# Altium PCB PCB1.PcbDoc
Units mm, origin at the board's own origin, x right, y up, seen from the top; angles counter-clockwise.
Board outline 67.59 x 51.31 mm, 2 copper layers (Top Layer, Bottom Layer), stack 1.534 mm thick; 29 components, 12 nets, 688 pads, 21 vias.
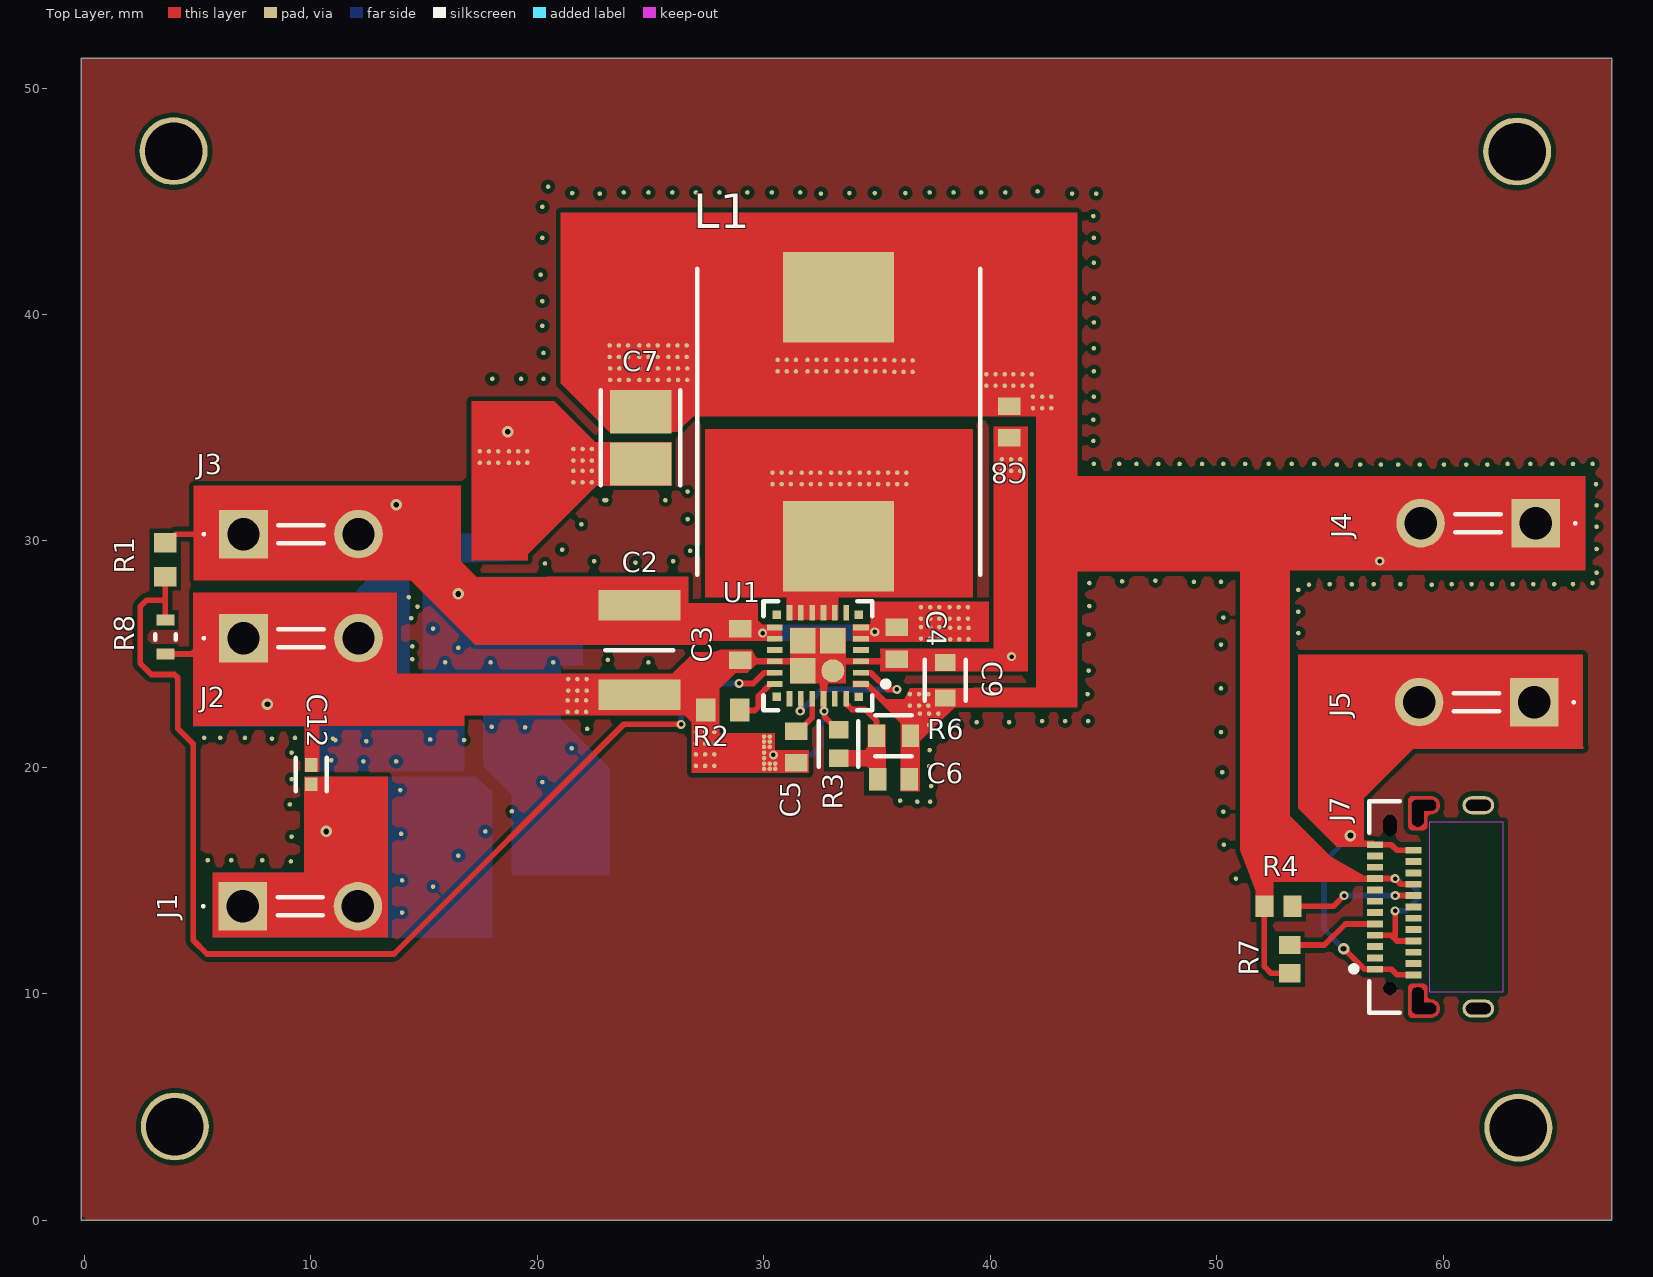
[diagram p0: Top Layer view]
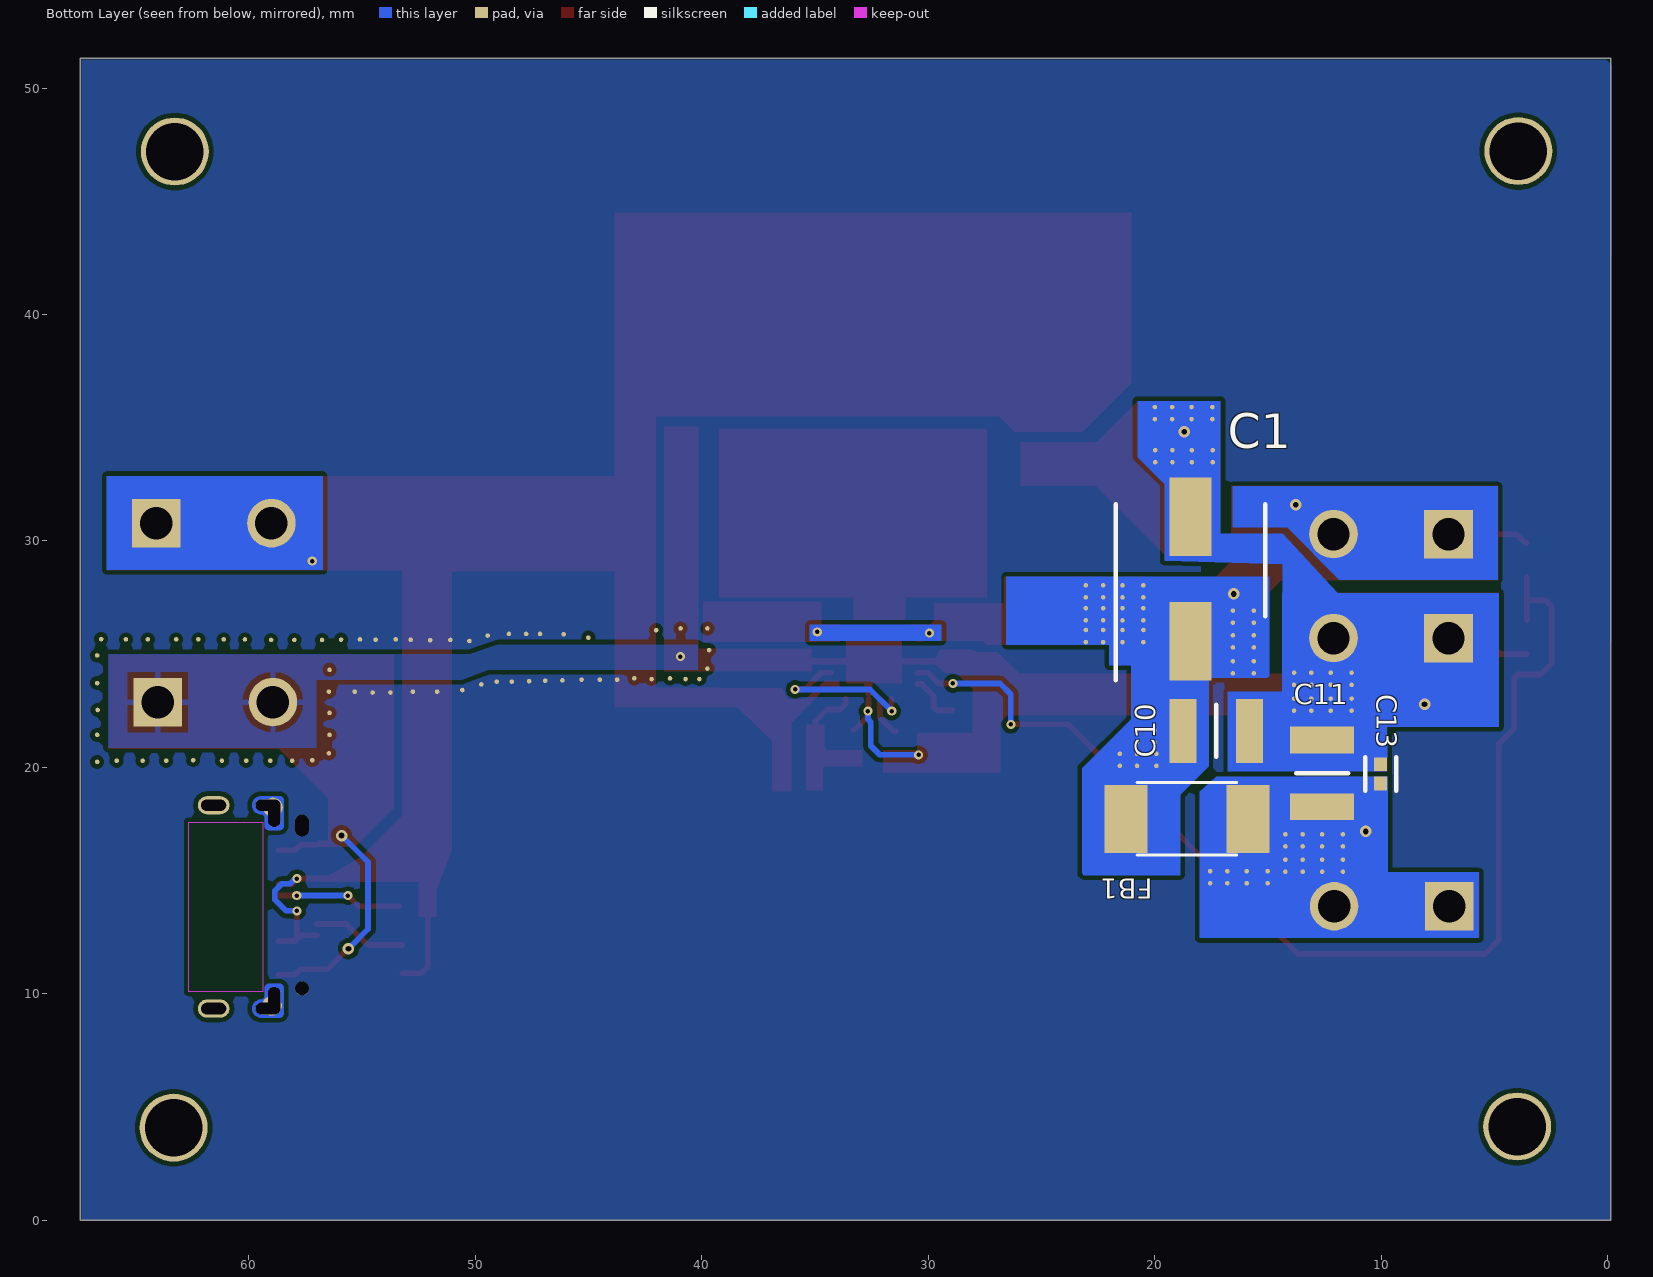
[diagram p1: Bottom Layer view, seen from below]
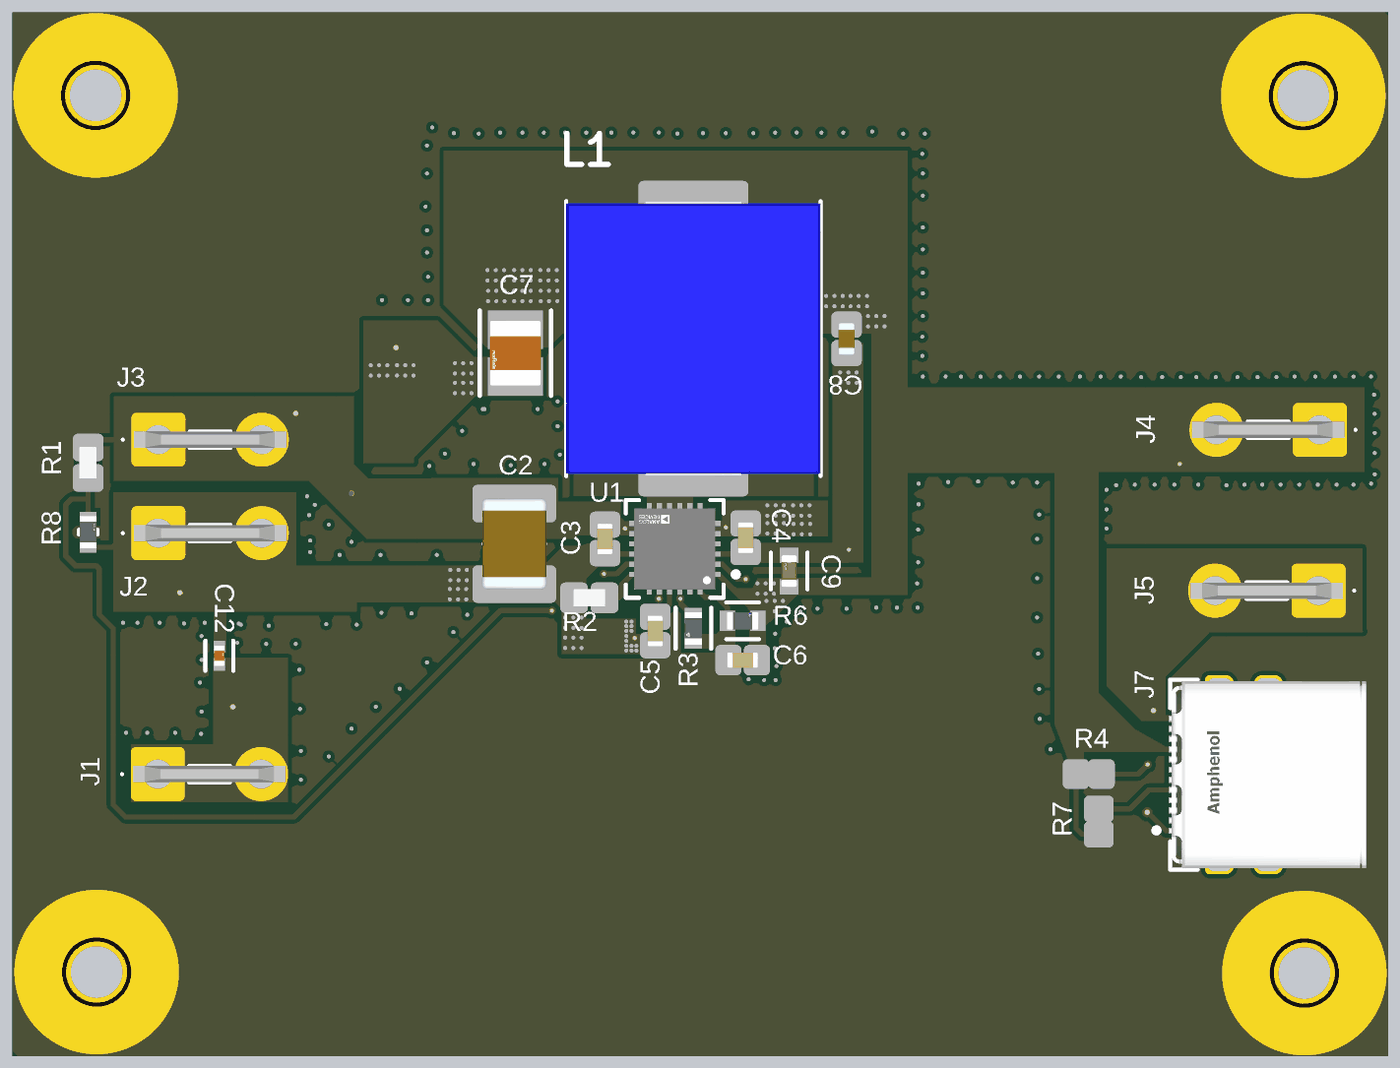
[diagram p2: 3D render of the assembled board from above, using the file's embedded part models]
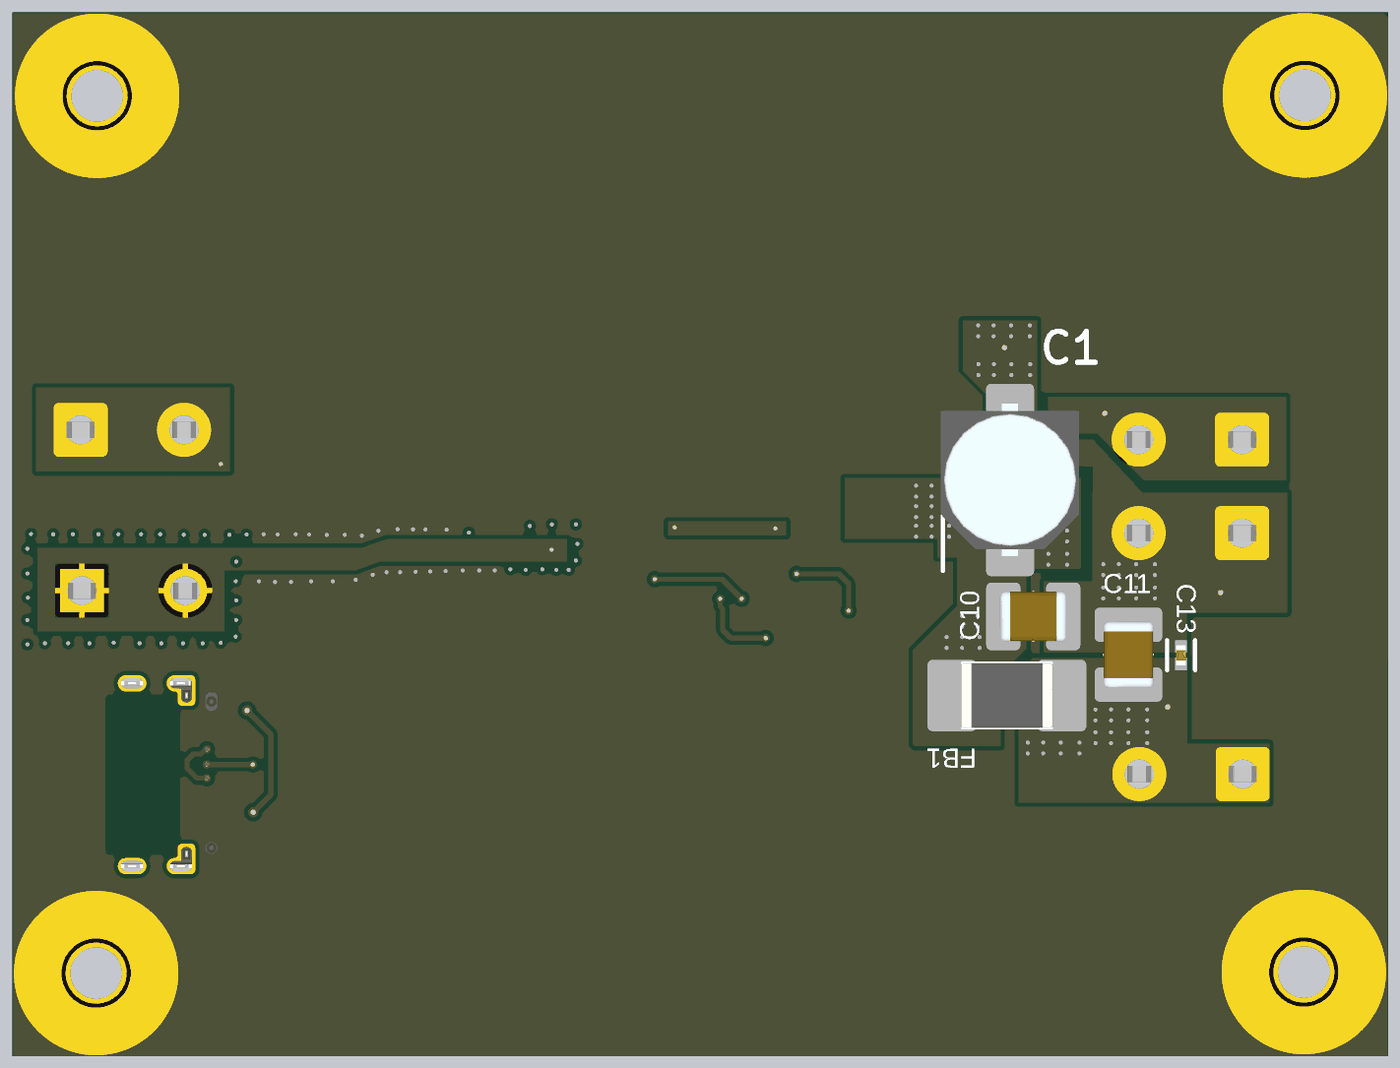
[diagram p3: 3D render of the assembled board from below, using the file's embedded part models]

## Layer stack, top to bottom
Top Solder: solder mask 0.0127, Solder Resist, Dk 3.3
Top Layer: signal copper 0.0178
Dielectric1: core 1.4986, FR-4, Dk 4.3
Bottom Layer: signal copper 0.0178
Bottom Solder: solder mask 0.0127, Solder Resist, Dk 3.3

## Board outline
-0.152,0 67.437,0 67.437,51.308 -0.152,51.308

## Design rules (kind name [scope] priority, off if disabled: settings)
Clearance [All] p1: gap=0.2 ignorepadtopadclearanceinfootprint=FALSE except(0: Arc-Hole Track-Hole SMDPad-Hole THPad-Hole Via-Hole Fill-Hole Poly-Hole Region-Hole Text-Hole)
DiffPairsRouting [All] p1: maxlimit=0.254 minlimit=0.254 mostfreqgap=0.254 toplayer_minwidth=0.254 toplayer_maxwidth=0.254 toplayer_prefwidth=0.254 bottomlayer_minwidth=0.254 bottomlayer_maxwidth=0.254 bottomlayer_prefwidth=0.254 maxuncoupledlength=12.7
HoleSize [All] p1: absolutevalues=TRUE maxlimit=7.62 minlimit=0.254 maxpercent=80.000 minpercent=20.000
MinimumAnnularRing [All] p1: minimumring=0.254
PasteMaskExpansion [All] p1: expansion=0.254
PlaneClearance [All] p1: clearance=0.381
PlaneConnect [All] p1: pad.planeconnectstyle=Relief pad.reliefexpansion=0.508 pad.reliefentries=4 pad.reliefconductorwidth=0.254 pad.reliefairgap=0.254 via.planeconnectstyle=Direct via.reliefexpansion=0.508 via.reliefentries=4 via.reliefconductorwidth=0.254 via.reliefairgap=0.254
PolygonConnect [All] p1: thpad.connectstyle=Relief thpad.reliefconductorwidth=0.254 thpad.reliefentries=4 thpad.polygonreliefangle="90 Angle" thpad.airgapwidth=0.254 smdpad.connectstyle=Relief smdpad.reliefconductorwidth=0.254 smdpad.reliefentries=4 smdpad.polygonreliefangle="90 Angle" smdpad.airgapwidth=0.254 via.connectstyle=Direct via.reliefconductorwidth=0.254 via.reliefentries=4 via.polygonreliefangle="90 Angle" via.airgapwidth=0.254
RoutingVias RoutingVias_small [All] p1: holewidth=0.2 width=0.4 viastyle="Through Hole" minholewidth=0.2 minwidth=0.4 maxholewidth=0.254 maxwidth=0.508
RoutingVias [All] p2: holewidth=0.254 width=0.508 viastyle="Through Hole" minholewidth=0.254 minwidth=0.508 maxholewidth=0.254 maxwidth=0.508
SMDNeckDown [InNet('NetC1_1')] p1: percent=100.000
SilkToSolderMaskClearance SilkscreenOverComponentPads [IsPad] p1: minsilkscreentomaskgap=0.254 clearancetoexposedcopper=TRUE
SolderMaskExpansion [All] p1: expansion=0.254 istentingtop=FALSE
SupplyNets "Schematic Supply Nets" [InNet('GND')] p1: voltage=0.000
Width [All] p1: maxlimit=0.254 minlimit=0.254 preferedwidth=0.254
24 further rules are at their usual default settings.

## Components (designator, comment, footprint, x,y, rotation, side; value= is the part's Value field where it differs from the comment)
C1 "875585845002" CAPAE660X800N 18.422,28.321 r90 bottom value=22µF
C2 "KGM43JR71H106KV" CAPC4532X280N 24.507,25.182 r90 top value=10uF
C3 "06035D105KAT2A" CAPC1608X90N 28.963,25.425 r90 top value=1µF
C4 "06035D105KAT2A" CAPC1608X90N 35.876,25.483 r90 top value=1µF
C5 "0603YC104K4T4A" CAPC1608X90N 31.431,20.899 r270 top value=0.1uF
C6 "06035U100JAT2A" CAPC1608X90N 35.725,19.469 r0 top value=10pF
C7 "GRM32ER61A107ME20L" FP-GRM32E-0_3-0_2-IPC_B 24.561,34.555 r270 top
C8 "KGM15BR71A105KT" CAPC1608X95N 40.832,35.255 r90 top value=1µF
C9 "GRM188R61E106MA73D" FP-GRM188-0_2-MFG 38.009,23.849 r90 top
C10 "KAM32LR71H106KL" CAPC3325X280N 17.279,21.615 r0 bottom value=10uF
C11 "KAM32LR71H106KL" CAPC3325X280N 12.605,19.736 r270 bottom value=10uF
C12 "GRM155R71H104KE14D" FP-GRM155-0_05-IPC_B 10.014,19.685 r90 top
C13 "GRM155R71H104KE14D" FP-GRM155-0_05-IPC_B 10.022,19.71 r90 bottom
FB1 "74279226101" WE-MPSB_181252 18.574,17.729 r0 bottom
J1 "1217056-1" 12170561 6.992,13.868 r0 top
J2 "1217056-1" 12170561 7.021,25.709 r0 top
J3 "1217056-1" 12170561 7.021,30.3 r0 top
J4 "1217056-1" 12170561 64.084,30.785 r180 top
J5 "1217056-1" 12170561 64.019,22.882 r180 top
J7 "12401899E412A" FP-12401899E412A-MFG 61.58,13.839 r90 top
L1 "SRP1245A-180M" INDPM135125X500N 33.306,35.267 r90 top
R1 "CRCW0603100KFKEA" RESC1608X50N 3.572,29.169 r270 top value=100k
R2 "CRCW0603232KFKEA" RESC1608X50N 28.191,22.532 r0 top value=232k
R3 "CRCW0603243KFKEAHP" FP-CRCW0603-HPe3-IPC_C 33.306,21.032 r270 top
R4 "CRCW06035K11FKTA" RESC1609X50X30NL10T20 52.73,13.868 r0 top value=5.11kR
R6 "CRCW06031M00FKEA" FP-CRCW0603-e3-MFG 35.725,21.399 r0 top
R7 "CRCW06035K11FKTA" RESC1609X50X30NL10T20 53.224,11.533 r90 top value=5.11kR
R8 "ESR03EZPJ243" FP-ESR03-MFG 3.57,25.759 r270 top
U1 "LT8640SIV-2#PBF" FP-LQFN-24-05-08-1511-MFG 32.386,24.932 r180 top

## Footprints (in the part's own frame and the unit in brackets; to place one, negate y for a bottom-side part, rotate by r counter-clockwise, add the part's x,y. Pads: shape width x height; smd on the part's side, far side on the other; paste and mask are expansions set on the pad)
12170561 [mm]
  rect 2.145x2.145 hole 1.43: 1(0,0)
  round 2.145 hole 1.43: 2(5.08,0)
  silkscreen extent -1.8,-0.4 3.54,0.4, body extent -1.21,-0.4 6.29,0.4, height 11.57
CAPAE660X800N [mm]
  rect 3.45x1.85 smd: 1(-2.75,0) 2(2.75,0)
  silkscreen extent -4.47,-3.3 3.3,3.3, body extent -3.75,-3.4 3.75,3.4, height 8
CAPC1608X90N [mm]
  rect 0.78x0.99 smd: 1(-0.7,0) 2(0.7,0)
  body extent -0.76,-0.38 0.76,0.38, height 0.91
CAPC1608X95N [mm]
  rect 0.78x0.99 smd: 1(-0.7,0) 2(0.7,0)
  body extent -0.8,-0.41 0.8,0.41, height 0.95
CAPC3325X280N [mm]
  rect 1.18x2.82 smd: 1(-1.47,0) 2(1.47,0)
  silkscreen extent 0,-1.15 0,1.15, body extent -1.65,-1.25 1.65,1.25, height 2.8
CAPC4532X280N [mm]
  rect 1.34x3.61 smd: 1(-1.98,0) 2(1.98,0)
  silkscreen extent 0,-1.5 0,1.5, body extent -2.25,-1.6 2.25,1.6, height 2.8
FP-12401899E412A-MFG [mm]
  rrect100% 0.5x1.1 hole 1.1 slot 0.5 at 0 deg paste-2539.97 mask+0: 1(-4.49,2.425) 2(4.49,2.425)
  round 0.866 smd far side paste-1000 mask+0: 1(-4.365,2.6) 2(4.396,2.644) 2(4.396,2.644)
  round 0.877 smd far side paste-1000 mask+0: 1(-4.365,2.6)
  rrect100% 1.2x0.55 hole 1.2 slot 0.55 at 90 deg paste-2539.97 mask+0: 1(-4.14,2.7) 2(4.14,2.7)
  rrect100% 0.8x1.4 hole 1.1 slot 0.5 at 0 deg paste-2539.97 mask+0: 3(-4.49,0.025) 4(4.49,0.025)
  rect 0.3x0.7 smd paste+0 mask+0: A1(-2.75,4.585) A2(-2.25,4.585) A3(-1.75,4.585) A4(-1.25,4.585) A5(-0.75,4.585) A6(-0.25,4.585) A7(0.25,4.585) A8(0.75,4.585) A9(1.25,4.585) A10(1.75,4.585) A11(2.25,4.585) A12(2.75,4.585) B1(2.5,2.885) B2(2,2.885) B3(1.5,2.885) B4(1,2.885) B5(0.5,2.885) B6(0,2.885) B7(-0.5,2.885) B8(-1,2.885) B9(-1.5,2.885) B10(-2,2.885) B11(-2.5,2.885) B12(-3,2.885)
  round 0.6 hole 0.6 unplated paste-2539.97 mask+0: ""(-3.6,3.925)
  rrect100% 0.95x0.6 hole 0.95 slot 0.6 at 90 deg unplated paste-2539.97 mask+0: ""(3.6,3.925)
  Top Layer region: -4.89,2.425 -4.89,2.125 -4.836,1.925 -4.69,1.779 -4.49,1.725 -4.49,1.725 -4.337,1.755 -4.207,1.842 -4.12,1.972 -4.09,2.125 -4.09,2.125 -4.072,2.197 -4.021,2.252 -3.95,2.275 -3.95,2.275 -3.59,2.275 -3.513,2.29 -3.449,2.334 -3.405,2.398 -3.39,2.475 -3.39,2.475 -3.39,2.925 -3.417,3.025 -3.49,3.098 -3.59,3.125 -3.59,3.125 -4.69,3.125 -4.79,3.098 -4.863,3.025 -4.89,2.925 -4.89,2.925
  Top Layer region: 4.89,2.125 4.836,1.925 4.69,1.779 4.49,1.725 4.49,1.725 4.337,1.755 4.207,1.842 4.12,1.972 4.09,2.125 4.09,2.125 4.072,2.197 4.021,2.252 3.95,2.275 3.95,2.275 3.59,2.275 3.513,2.29 3.449,2.334 3.405,2.398 3.39,2.475 3.39,2.475 3.39,2.925 3.417,3.025 3.49,3.098 3.59,3.125 3.59,3.125 4.69,3.125 4.79,3.098 4.863,3.025 4.89,2.925 4.89,2.925 4.89,2.925
  Bottom Layer region: -4.89,2.125 -4.836,1.925 -4.69,1.779 -4.49,1.725 -4.49,1.725 -4.337,1.755 -4.207,1.842 -4.12,1.972 -4.09,2.125 -4.09,2.125 -4.072,2.197 -4.021,2.252 -3.95,2.275 -3.95,2.275 -3.59,2.275 -3.513,2.29 -3.449,2.334 -3.405,2.398 -3.39,2.475 -3.39,2.475 -3.39,2.925 -3.417,3.025 -3.49,3.098 -3.59,3.125 -3.59,3.125 -4.69,3.125 -4.79,3.098 -4.863,3.025 -4.89,2.925 -4.89,2.925 -4.89,2.925
  Bottom Layer region: 4.89,2.125 4.836,1.925 4.69,1.779 4.49,1.725 4.49,1.725 4.337,1.755 4.207,1.842 4.12,1.972 4.09,2.125 4.09,2.125 4.072,2.197 4.021,2.252 3.95,2.275 3.95,2.275 3.59,2.275 3.513,2.29 3.449,2.334 3.405,2.398 3.39,2.475 3.39,2.475 3.39,2.925 3.417,3.025 3.49,3.098 3.59,3.125 3.59,3.125 4.69,3.125 4.79,3.098 4.863,3.025 4.89,2.925 4.89,2.925 4.89,2.925
  Keep-Out Layer region: -3.74,-1.075 3.74,-1.075 3.74,2.185 -3.74,2.185
  silkscreen extent -4.66,3.5 4.66,5.65, body extent -4.99,-4.95 4.99,5.03, height 0.25
FP-CRCW0603-e3-MFG [mm]
  rect 0.75x1 smd paste+0 mask+0: 1(-0.75,0) 2(0.75,0)
  silkscreen extent -0.8,-0.9 0.8,0.9, body extent -1.22,-0.6 1.22,0.6, height 0.25
FP-CRCW0603-HPe3-IPC_C [mm]
  rect 0.758x0.862 smd paste+0 mask+0: 1(-0.627,0) 2(0.627,0)
  silkscreen extent -1.01,-0.87 1.01,0.87, body extent -1.11,-0.58 1.11,0.58, height 0.25
FP-ESR03-MFG [mm]
  rect 0.5x0.8 smd paste+0 mask+0: 1(-0.75,0) 2(0.75,0)
  silkscreen extent -0.13,-0.45 0.13,0.45, body extent -1.1,-0.55 1.1,0.55, height 0.25
FP-GRM32E-0_3-0_2-IPC_B [mm]
  rect 1.903x2.706 smd paste+0 mask+0: 1(-1.151,0) 2(1.151,0)
  silkscreen extent -2.1,-1.75 2.1,1.75, body extent -2.35,-1.6 2.35,1.6, height 0.25
FP-GRM155-0_05-IPC_B [mm]
  rect 0.615x0.572 smd paste+0 mask+0: 1(-0.429,0) 2(0.429,0)
  silkscreen extent -0.74,-0.69 0.74,0.69, body extent -0.5,-0.25 0.5,0.25, height 0.55
FP-GRM188-0_2-MFG [mm]
  rect 0.75x0.9 smd paste+0 mask+0: 1(-0.775,0) 2(0.775,0)
  silkscreen extent -0.9,-0.9 0.9,0.9, body extent -1.25,-0.6 1.25,0.6, height 0.25
FP-LQFN-24-05-08-1511-MFG [mm]
  rect 0.7x0.25 smd paste+0 mask+0: 1(-1.9,1.25) 2(-1.9,0.75) 3(-1.9,0.25) 4(-1.9,-0.25) 5(-1.9,-0.75) 6(-1.9,-1.25) 13(1.9,-1.25) 14(1.9,-0.75) 15(1.9,-0.25) 16(1.9,0.25) 17(1.9,0.75) 18(1.9,1.25)
  rect 0.25x0.7 smd paste+0 mask+0: 7(-1.25,-1.9) 8(-0.75,-1.9) 9(-0.25,-1.9) 10(0.25,-1.9) 11(0.75,-1.9) 12(1.25,-1.9) 19(1.25,1.9) 20(0.75,1.9) 21(0.25,1.9) 22(-0.25,1.9) 23(-0.75,1.9) 24(-1.25,1.9)
  round 1.012 smd paste+0 mask+0: 25(-0.663,0.663)
  rect 1.125x1.125 smd paste+0 mask+0: 26(0.663,0.663) 27(-0.663,-0.663) 28(0.663,-0.663)
  rect 0.375x0.375 smd paste+0 mask+0: ""(-1.813,1.813) ""(-1.813,-1.813) ""(1.813,1.813) ""(1.813,-1.813)
  Top Layer region: -1.225,0.1 -1.225,0.942 -0.942,1.225 -0.1,1.225 -0.1,0.1
  silkscreen extent -3.13,-2.4 2.4,2.4, body extent -2.35,-2.35 2.35,2.35, height 0.25
INDPM135125X500N [mm]
  rect 4x4.9 smd: 1(-5.5,0) 2(5.5,0)
  silkscreen extent -6.75,-6.25 6.75,6.25, body extent -6.75,-6.25 6.75,6.25, height 5
RESC1608X50N [mm]
  rect 0.85x1 smd: 1(-0.75,0) 2(0.75,0)
  body extent -0.77,-0.43 0.78,0.42, height 0.45
RESC1609X50X30NL10T20 [mm] "Chip Resistor, 2-Leads, Body 1.55x0.85mm, IPC Medium Density"
  rect 0.8x0.95 smd: 1(-0.625,0) 2(0.625,0)
  body extent -0.82,-0.48 0.82,0.48, height 0.5
WE-MPSB_181252 [mm]
  rect 1.9x3 smd: 1(-2.7,0) 2(2.7,0)
  silkscreen extent -2.2,-1.6 2.2,1.6, body extent -2.25,-1.6 2.25,1.6, height 2.3

## Part data
C1: "Capacitor Polarised", Manufacturer_Name="Wurth Elektronik", Mouser Part Number=710-875585845002, Datasheet Link=https://www.we-online.com/components/products/datasheet/875585845002.pdf, Height=8mm, Manufacturer_Part_Number=875585845002, Mouser Price/Stock=https://www.mouser.co.uk/ProductDetail/Wurth-Elektronik/875585845002?qs=9vOqFld9vZXZunBiCR9wnA%3D%3D
C2: "Capacitor", Manufacturer_Name="Kyocera AVX", Mouser Part Number=581-KGM43JR71H106KV, Datasheet Link=https://datasheets.kyocera-avx.com/KGM_X7R.pdf, Height=2.8mm, Manufacturer_Part_Number=KGM43JR71H106KV, Mouser Price/Stock=https://www.mouser.co.uk/ProductDetail/KYOCERA-AVX/KGM43JR71H106KV?qs=Jm2GQyTW%2FbgbK3VIRNTnpg%3D%3D
C3 C4: "Capacitor", Manufacturer_Name="Kyocera AVX", Mouser Part Number=581-06035D105KAT2A, Arrow Part Number=06035D105KAT2A, Arrow Price/Stock=https://www.arrow.com/en/products/06035d105kat2a/avx, Datasheet Link=https://componentsearchengine.com/Datasheets/1/06031A100FAT2A.pdf, Height=0.9mm, Manufacturer_Part_Number=06035D105KAT2A, Mouser Price/Stock=https://www.mouser.co.uk/ProductDetail/AVX/06035D105KAT2A?qs=jHkklCh7amj4RS3QGB%2FJvQ%3D%3D
C5: "Capacitor", Manufacturer_Name="Kyocera AVX", Mouser Part Number=581-0603YC104K4T4A, Arrow Part Number=0603YC104K4T4A, Arrow Price/Stock=https://www.arrow.com/en/products/0603yc104k4t4a/avx?utm_currency=USD&region=nac, Datasheet Link=https://componentsearchengine.com/Datasheets/1/06031A100FAT2A.pdf, Height=0.9mm, Manufacturer_Part_Number=0603YC104K4T4A, Mouser Price/Stock=https://www.mouser.co.uk/ProductDetail/KYOCERA-AVX/0603YC104K4T4A?qs=Cej1j9ztgjEkPqVJkA4Bng%3D%3D
C6 C8: "Capacitor", Manufacturer_Name="Kyocera AVX"
  C6: Datasheet Link=https://componentsearchengine.com/Datasheets/1/06031A100FAT2A.pdf, Height=0.9mm, Manufacturer_Part_Number=06035U100JAT2A
  C8: Datasheet Link=https://datasheets.kyocera-avx.com/KGM_X7R.pdf, Height=0.95mm, Manufacturer_Part_Number=KGM15BR71A105KT
C7: library part CMP-06035-048205-1, "Chip Multilayer Ceramic Capacitors for General Purpose, 1210, 100uF, X5R, 15%, 20%, 10V", Capacitance=100uF, Case Code (Imperial)=1210, Case Code (Metric)=3225, Dielectric=X5R, Dielectric Material=Ceramic, Max Operating Temperature=85°C, Min Operating Temperature=-55°C, Package Quantity=1000, Tolerance=20%, Voltage=10V, Case/Package=1210, Depth=2.5mm, Dissipation Factor=0.035%, Height=2.5mm, Lead Free="Lead Free", Length=3.2mm, Material=Ceramic, Mount="Surface Mount", Packaging="Tape and Reel", REACH SVHC="No SVHC", Termination=SMD/SMT, Thickness=0.106inch, Voltage Rating=10V, Voltage Rating (DC)=10V, Weight=0.00388oz, Width=2.5mm
C9: library part CMP-2006-02520-2, "Chip Multilayer Ceramic Capacitors for General Purpose, 0603, 10uF, X5R, 15%, 20%, 25V", Capacitance=10uF, Case Code (Imperial)=0603, Case Code (Metric)=1608, Dielectric=X5R, Max Operating Temperature=85°C, Min Operating Temperature=-55°C, Package Quantity=1, Resistor Type=Ceramic, Tolerance=20%, Voltage=25V, Case/Package=0603, Depth=0.8mm, Height=0.8mm, Lead Free="Lead Free", Length=1.6mm, Mount="Surface Mount", Number of Pins=2, Packaging="Tape and Reel", REACH SVHC="No SVHC", Termination=SMD/SMT, Thickness=0.031inch, Voltage Rating=25V, Voltage Rating (DC)=25V, Weight=0.000222oz, Width=0.031inch
C10 C11: "Capacitor", Manufacturer_Name="Kyocera AVX", Mouser Part Number=581-KAM32LR71H106KL, Datasheet Link=https://spicat.kyocera-avx.com/product/KAM32LR71H106KL, Height=2.8mm, Manufacturer_Part_Number=KAM32LR71H106KL, Mouser Price/Stock=https://www.mouser.co.uk/ProductDetail/KYOCERA-AVX/KAM32LR71H106KL?qs=Jm2GQyTW%2FbgMjBEJHOJ9ig%3D%3D
C12 C13: library part CMP-2008-04639-2, "Chip Multilayer Ceramic Capacitors for General Purpose, 0402, 0.10uF, X7R, 15%, 10%, 50V", Capacitance=100nF, Case Code (Imperial)=0402, Case Code (Metric)=1005, Dielectric=X7R, Dielectric Material=Ceramic, Max Operating Temperature=125°C, Min Operating Temperature=-55°C, Package Quantity=10000, Tolerance=10%, Voltage=50V, Case/Package=0402, Depth=0.5mm, Dissipation Factor=0.025%, Height=0.5mm, Lead Free="Lead Free", Length=1mm, Material=Ceramic, Mount="Surface Mount", Packaging="Tape and Reel", REACH SVHC="No SVHC", Resistor Type=Ceramic, Termination=SMD/SMT, Thickness=0.022inch, Voltage Rating=50V, Voltage Rating (DC)=50V, Weight=0.000212oz, Width=0.5mm
FB1: "Inductor", Manufacturer_Name="Wurth Elektronik", Mouser Part Number=710-74279226101, Datasheet Link=http://componentsearchengine.com/Datasheets/1/74279226101.pdf, Manufacturer_Part_Number=74279226101, Mouser Price/Stock=https://www.mouser.co.uk/ProductDetail/Wurth-Elektronik/74279226101?qs=cFlH0mFHHFoXMLq8ANMOrg%3D%3D
J1 J2 J3 J4 J5: "Connector", Manufacturer_Name="TE Connectivity", Mouser Part Number=571-1217056-1, Arrow Part Number=1217056-1, Arrow Price/Stock=https://www.arrow.com/en/products/1217056-1/te-connectivity?utm_currency=USD&region=europe, Datasheet Link=https://www.te.com/commerce/DocumentDelivery/DDEController?Action=srchrtrv&DocNm=82159_PCB_TERMINALS_AND_DISCONNECTS&DocType=Catalog%20Section&DocLang=English&PartCntxt=1217056-1&DocFormat=pdf, Height=13mm, Manufacturer_Part_Number=1217056-1, Mouser Price/Stock=https://www.mouser.co.uk/ProductDetail/TE-Connectivity-AMP/1217056-1?qs=yW2XQG1Ii9EcBJhZ77Yj5A%3D%3D
J7: library part CMP-02355-000006-1, "USB TYPE C, RECEPTACLE, TOP MOUN"
L1: "Inductor", Manufacturer_Name=Bourns, Mouser Part Number=652-SRP1245A-180M, Arrow Part Number=SRP1245A-180M, Arrow Price/Stock=https://www.arrow.com/en/products/srp1245a-180m/bourns?region=europe, Datasheet Link=https://www.bourns.com/docs/Product-Datasheets/SRP1245A.pdf, Height=5mm, Manufacturer_Part_Number=SRP1245A-180M, Mouser Price/Stock=https://www.mouser.co.uk/ProductDetail/Bourns/SRP1245A-180M?qs=7z%252BmIopC6%2FJMVrKhbhk5JQ%3D%3D
R1: "Resistor", Manufacturer_Name=Vishay, Mouser Part Number=71-CRCW0603-100K-E3, Arrow Part Number=CRCW0603100KFKEA, Arrow Price/Stock=https://www.arrow.com/en/products/crcw0603100kfkea/vishay?utm_currency=USD&region=nac, Datasheet Link=http://www.vishay.com/docs/20035/dcrcwe3.pdf, Height=0.5mm, Manufacturer_Part_Number=CRCW0603100KFKEA, Mouser Price/Stock=https://www.mouser.co.uk/ProductDetail/Vishay-Dale/CRCW0603100KFKEA?qs=6dqgS%252BKntICWHMMdIzt5%2FQ%3D%3D
R2: "Resistor", Manufacturer_Name=Vishay, Mouser Part Number=71-CRCW0603-232K-E3, Arrow Part Number=CRCW0603232KFKEA, Arrow Price/Stock=https://www.arrow.com/en/products/crcw0603232kfkea/vishay, Datasheet Link=http://www.vishay.com/docs/20035/dcrcwe3.pdf, Height=0.5mm, Manufacturer_Part_Number=CRCW0603232KFKEA, Mouser Price/Stock=https://www.mouser.co.uk/ProductDetail/Vishay-Dale/CRCW0603232KFKEA?qs=NHKSztHah43mx5UrSmXOxA%3D%3D
R3: library part CMP-02407-012113-1, "RES Thick Film, 243kΩ, 1%, 0.33W, 100ppm/°C, 0603", Case/Package=0603, Max Operating Temperature=155°C, Max Power Dissipation=250mW, Min Operating Temperature=-55°C, Package Quantity=5000, Resistance=243kR, Resistor Type="Thick Film", Temperature Coefficient=100ppm/°C, Tolerance=1%, Features="Automotive AEC-Q200", Height=0.022inch, Lead Free="Lead Free", Length=0.063inch, Number of Terminations=2, Packaging="Tape and Reel", RoHS Compliant=Yes, Series=CRCW-HP, Width=0.033inch
R4 R7: library part CMP-2000-03483-1, Manufacturer="Vishay Dale", Part Number=CRCW06035K11FKTA
R6: library part CMP-2000-03013-2, "RES Thick Film, 1MΩ, 1%, 0.1W, 100ppm/°C, 0603", Case Code (Imperial)=0603, Case Code (Metric)=1608, Max Operating Temperature=155°C, Max Power Dissipation=100mW, Min Operating Temperature=-55°C, Package Quantity=10, Resistance=1MR, Temperature Coefficient=100ppm/°C, Tolerance=1%, Voltage Rating=75V, Case/Package=0603, Composition="Thick Film", Contact Plating=Tin, Depth=0.85mm, Features="Automotive AEC-Q200", Height=0.45mm, Lead Free="Lead Free", Length=1.55mm, Military Standard=Not, Mount="Surface Mount", Number of Pins=2, Number of Terminations=2, Packaging="Tape and Reel", Power Rating=100mW, Radiation Hardening=No, Termination=SMD/SMT, Voltage Rating (DC)=75V, Weight=7.1E-05oz, Width=0.85mm
R8: library part CMP-08839-007552-1, "24kΩ ±5% 0.25W 0603 Anti-Surge Chip Resistor AEC-Q200", Case Code (Imperial)=0603, Case Code (Metric)=1608, Max Operating Temperature=155°C, Max Power Dissipation=250mW, Min Operating Temperature=-55°C, Package Quantity=5000, Resistance=24kR, Resistor Type="Thick Film", Temperature Coefficient=200ppm/°C, Tolerance=5%, Case/Package=0603, Features="Automotive AEC-Q200", Height=0.022inch, Length=0.063inch, Number of Terminations=2, Packaging="Tape and Reel", RoHS Compliant=Yes, Series=ESR, Width=0.031inch
U1: library part CMP-09139-000228-1, "IC REG BUCK ADJUSTABLE 6A 24LQFN", RoHS Compliant=Yes

## Free pads (board coordinates)
  round 0.254 smd: 2(12.101,25.709)
  round 3 hole 2.54 paste-2539.97 mask+2.54: 10(63.271,47.199) 11(63.322,4.089)
  round 3 hole 2.54 unplated paste-2539.97 mask+2.54: 12(3.988,4.14) 13(3.937,47.219)
  round 0.2 smd paste+0 mask+0: 14(30.263,21.361) 15(30.265,21.14) 16(30.263,20.904) 17(30.505,20.168) 18(30.505,19.939) 19(30.265,19.939) 20(30.265,20.168) 21(30.009,20.168) 22(30.009,19.939) 23(30.009,20.41) 24(30.009,20.65) 25(30.009,20.904) 26(30.009,21.14) 27(30.009,21.361) 28(17.457,33.96) 28(18.747,33.96) 28(21.337,22.962) 28(21.363,23.901) 28(21.591,33.096) 28(21.591,34.061) 28(23.192,38.633) 28(23.217,37.617) 28(24.502,37.617) 28(24.502,38.633) 28(25.782,38.633) 28(25.808,37.617) 28(27.002,20.574) 28(27.002,21.565) 28(30.384,33.02) 28(30.608,37.998) 28(31.675,33.02) 28(31.929,37.998) 28(32.971,33.02) 28(33.25,37.998) 28(34.241,33.02) 28(34.52,37.998) 28(35.485,33.02) 28(35.765,37.973) 28(36.452,23.238) 28(36.894,22.377) 28(36.94,26.198) 28(36.94,27.076) 28(38.203,27.076) 28(38.228,26.162) 28(39.829,37.363) 28(40.514,33.604) 28(41.022,37.363) 28(41.886,36.373) 29(17.861,33.96) 29(19.152,33.96) 29(21.742,22.962) 29(21.768,23.901) 29(21.996,33.096) 29(21.996,34.061) 29(23.597,38.633) 29(23.622,37.617) 29(24.906,37.617) 29(24.906,38.633) 29(26.187,38.633) 29(26.213,37.617) 29(27.407,20.574) 29(27.407,21.565) 29(30.789,33.02) 29(31.013,37.998) 29(32.08,33.02) 29(32.334,37.998) 29(33.376,33.02) 29(33.655,37.998) 29(34.646,33.02) 29(34.925,37.998) 29(35.89,33.02) 29(36.17,37.973) 29(36.857,23.238) 29(37.299,22.377) 29(37.345,26.198) 29(37.345,27.076) 29(38.608,27.076) 29(38.633,26.162) 29(40.234,37.363) 29(40.919,33.604) 29(41.427,37.363) 29(42.291,36.373) 30(18.268,33.96) 30(19.558,33.96) 30(22.149,22.962) 30(22.174,23.901) 30(22.403,33.096) 30(22.403,34.061) 30(24.003,38.633) 30(24.028,37.617) 30(25.313,37.617) 30(25.313,38.633) 30(26.594,38.633) 30(26.619,37.617) 30(27.813,20.574) 30(27.813,21.565) 30(31.195,33.02) 30(31.42,37.998) 30(32.487,33.02) 30(32.741,37.998) 30(33.782,33.02) 30(34.061,37.998) 30(35.052,33.02) 30(35.331,37.998) 30(36.297,33.02) 30(36.576,37.973) 30(37.263,23.238) 30(37.705,22.377) 30(37.751,26.198) 30(37.751,27.076) 30(39.014,27.076) 30(39.04,26.162) 30(40.64,37.363) 30(41.326,33.604) 30(41.834,37.363) 30(42.697,36.373) 31(18.268,33.452) 31(19.558,33.452) 31(22.149,22.454) 31(22.174,23.393) 31(22.403,32.588) 31(22.403,33.553) 31(24.003,38.125) 31(24.028,37.109) 31(25.313,37.109) 31(25.313,38.125) 31(26.594,38.125) 31(26.619,37.109) 31(27.813,20.066) 31(27.813,21.057) 31(31.195,32.512) 31(31.42,37.49) 31(32.487,32.512) 31(32.741,37.49) 31(33.782,32.512) 31(34.061,37.49) 31(35.052,32.512) 31(35.331,37.49) 31(36.297,32.512) 31(36.576,37.465) 31(37.263,22.73) 31(37.751,25.69) 31(37.751,26.568) 31(39.014,26.568) 31(39.04,25.654) 31(40.64,36.855) 31(41.326,33.096) 31(41.834,36.855) 31(42.697,35.865) 32(17.861,33.452) 32(19.152,33.452) 32(21.742,22.454) 32(21.768,23.393) 32(21.996,32.588) 32(21.996,33.553) 32(23.597,38.125) 32(23.622,37.109) 32(24.906,37.109) 32(24.906,38.125) 32(26.187,38.125) 32(26.213,37.109) 32(27.407,20.066) 32(27.407,21.057) 32(30.789,32.512) 32(31.013,37.49) 32(32.08,32.512) 32(32.334,37.49) 32(33.376,32.512) 32(33.655,37.49) 32(34.646,32.512) 32(34.925,37.49) 32(35.89,32.512) 32(36.17,37.465) 32(36.857,22.73) 32(37.299,21.869) 32(37.345,25.69) 32(37.345,26.568) 32(38.608,26.568) 32(38.633,25.654) 32(40.234,36.855) 32(40.919,33.096) 32(41.427,36.855) 32(42.291,35.865) 33(17.457,33.452) 33(18.747,33.452) 33(21.337,22.454) 33(21.363,23.393) 33(21.591,32.588) 33(21.591,33.553) 33(23.192,38.125) 33(23.217,37.109) 33(24.502,37.109) 33(24.502,38.125) 33(25.782,38.125) 33(25.808,37.109) 33(27.002,20.066) 33(27.002,21.057) 33(30.384,32.512) 33(30.608,37.49) 33(31.675,32.512) 33(31.929,37.49) 33(32.971,32.512) 33(33.25,37.49) 33(34.241,32.512) 33(34.52,37.49) 33(35.485,32.512) 33(35.765,37.465) 33(36.452,22.73) 33(36.94,25.69) 33(36.94,26.568) 33(38.203,26.568) 33(38.228,25.654) 33(39.829,36.855) 33(40.514,33.096) 33(41.022,36.855) 33(41.886,35.865) 128(5.283,21.304) 129(5.994,21.304) 130(7.087,21.304) 131(8.28,21.267) 132(9.296,21.304) 133(9.144,20.65) 134(9.144,19.482) 135(9.068,18.364) 136(9.144,16.942) 137(9.119,15.85) 138(7.849,15.9) 139(6.477,15.9) 140(5.44,15.9) 141(10.973,21.267) 142(10.897,20.32) 143(12.319,20.264) 144(13.767,20.264) 145(13.945,18.999) 146(13.981,17.069) 147(14.024,15.011) 148(14.024,13.589) 149(15.392,14.732) 150(16.51,16.104) 151(17.704,17.17) 152(18.872,18.059) 153(20.218,19.355) 154(21.514,20.844) 155(22.2,21.7) 156(19.456,21.766) 157(17.983,21.793) 158(16.764,21.209) 159(15.265,21.234) 160(12.446,21.159) 161(11.074,21.209) 162(14.322,27.517) 163(14.427,26.594) 164(14.478,25.343) 165(14.478,24.78) 166(15.926,24.638) 167(17.932,24.638) 168(20.701,24.638) 169(23.114,24.749) 170(24.906,24.638) 171(16.51,25.281) 172(15.392,26.125) 173(14.707,27.102) 174(22.962,31.801) 175(21.946,30.734) 176(21.095,29.616) 177(20.336,29.007) 178(22.504,29.108) 179(24.333,29.044) 180(25.994,29.108) 181(26.744,29.566) 182(26.634,30.963) 183(26.634,32.182) 184(25.654,31.801) 185(23.038,31.801) 186(20.269,37.16) 187(19.279,37.16) 188(18.009,37.16) 189(20.269,38.303) 190(20.218,39.497) 191(20.218,40.589) 192(20.142,41.758) 193(20.218,43.383) 194(20.218,44.755) 195(20.472,45.644) 196(21.539,45.364) 197(22.758,45.339) 198(23.814,45.39) 199(24.906,45.39) 200(25.959,45.39) 201(27.002,45.39) 202(28.042,45.39) 203(29.275,45.39) 204(30.356,45.39) 205(31.609,45.39) 206(32.524,45.339) 207(33.782,45.364) 208(34.9,45.364) 209(36.253,45.364) 210(37.325,45.39) 211(38.379,45.39) 212(39.599,45.39) 213(40.665,45.39) 214(42.088,45.441) 215(43.612,45.339) 216(44.679,45.339) 217(44.552,44.348) 218(44.577,43.383) 219(44.577,42.291) 220(44.577,40.729) 221(44.577,39.649) 222(44.577,38.506) 223(44.577,37.49) 224(44.577,36.373) 225(44.552,35.357) 226(44.552,34.417) 227(44.577,33.404) 228(45.695,33.404) 229(46.457,33.401) 230(47.422,33.401) 231(48.362,33.401) 232(49.352,33.401) 233(50.292,33.404) 234(51.257,33.401) 235(52.293,33.404) 236(53.315,33.404) 237(54.305,33.401) 238(55.305,33.376) 239(56.337,33.376) 240(57.252,33.376) 241(58.014,33.376) 242(58.968,33.376) 243(60.037,33.376) 244(61.021,33.376) 245(61.95,33.376) 246(62.844,33.404) 247(63.856,33.404) 248(64.821,33.401) 249(65.735,33.401) 250(66.599,33.404) 251(66.751,32.512) 252(66.777,31.572) 253(66.777,30.632) 254(66.777,29.645) 255(66.777,28.6) 256(66.599,28.143) 257(65.735,28.092) 258(64.906,28.092) 259(63.983,28.092) 260(63.068,28.092) 261(62.154,28.092) 262(61.255,28.092) 263(60.376,28.092) 264(59.495,28.067) 265(58.113,28.092) 266(56.934,28.092) 267(55.965,28.092) 268(54.99,28.092) 269(54.077,28.067) 270(53.603,27.838) 271(53.603,26.873) 272(53.603,25.933) 273(36.017,18.529) 274(36.779,18.486) 275(37.345,18.486) 276(37.389,19.177) 277(37.299,20.048) 278(37.325,20.766) 279(37.884,21.361) 280(38.557,21.844) 281(39.401,21.996) 282(40.832,21.996) 283(42.291,22.048) 283(43.307,22.047) 283(44.323,22.048) 286(44.298,23.238) 287(44.348,24.277) 288(44.348,25.883) 289(44.374,27.127) 290(44.374,28.143) 291(45.822,28.219) 292(47.295,28.245) 293(48.997,28.194) 294(50.19,28.194) 295(50.292,26.619) 296(50.19,25.425) 297(50.19,23.493) 298(50.19,21.562) 299(50.241,19.787) 300(50.292,18.046) 301(50.317,16.586) 302(50.851,15.088)
  round 0.2 smd far side paste+0 mask+0: 34(13.843,23.038) 34(13.843,24.181) 34(14.224,15.926) 34(14.224,17.043) 34(17.551,15.418) 34(19.975,34.011) 34(19.99,35.916) 34(20.777,21.641) 34(21.539,20.602) 34(23.038,26.068) 34(23.038,27.03) 34(23.038,28.042) 35(13.081,23.038) 35(13.081,24.181) 35(13.462,15.926) 35(13.462,17.043) 35(16.789,15.418) 35(19.213,34.011) 35(19.228,35.916) 35(20.015,21.641) 35(20.777,20.602) 35(22.276,26.068) 35(22.276,27.03) 35(22.276,28.042) 36(12.224,23.038) 36(12.224,24.181) 36(12.605,15.926) 36(12.605,17.043) 36(15.933,15.418) 36(16.542,24.689) 36(16.542,25.832) 36(16.542,26.924) 36(18.356,34.011) 36(18.371,35.916) 36(19.92,20.602) 36(21.419,26.068) 36(21.419,27.03) 36(21.419,28.042) 37(11.303,23.038) 37(11.303,24.181) 37(11.684,15.926) 37(11.684,17.043) 37(15.011,15.418) 37(15.621,24.689) 37(15.621,25.832) 37(15.621,26.924) 37(17.435,34.011) 37(17.45,35.916) 37(20.498,26.068) 37(20.498,27.03) 37(20.498,28.042) 38(11.303,22.504) 38(11.303,23.647) 38(11.684,15.392) 38(11.684,16.51) 38(15.011,14.884) 38(15.621,24.155) 38(15.621,25.298) 38(15.621,26.391) 38(17.435,33.477) 38(17.45,35.382) 38(20.498,25.535) 38(20.498,26.496) 38(20.498,27.508) 39(12.224,22.504) 39(12.224,23.647) 39(12.605,15.392) 39(12.605,16.51) 39(15.933,14.884) 39(16.542,24.155) 39(16.542,25.298) 39(16.542,26.391) 39(18.356,33.477) 39(18.371,35.382) 39(19.92,20.069) 39(21.419,25.535) 39(21.419,26.496) 39(21.419,27.508) 40(13.081,22.504) 40(13.081,23.647) 40(13.462,15.392) 40(13.462,16.51) 40(16.789,14.884) 40(19.213,33.477) 40(19.228,35.382) 40(20.015,21.107) 40(20.777,20.069) 40(22.276,25.535) 40(22.276,26.496) 40(22.276,27.508) 41(13.843,22.504) 41(13.843,23.647) 41(14.224,15.392) 41(14.224,16.51) 41(17.551,14.884) 41(19.975,33.477) 41(19.99,35.382) 41(20.777,21.107) 41(21.539,20.069) 41(23.038,25.535) 41(23.038,26.496) 41(23.038,27.508) 42(40.105,23.901) 43(40.716,23.901) 44(41.402,23.934) 45(42.215,23.901) 46(42.977,23.934) 79(57.201,20.32) 80(58.09,20.295) 81(59.055,20.295) 82(60.12,20.295) 83(61.189,20.295) 84(62.459,20.32) 85(63.652,20.295) 86(64.694,20.295) 87(65.837,20.295) 88(66.7,20.244) 89(66.7,21.438) 90(66.675,22.536) 91(66.7,23.724) 92(66.7,24.943) 93(66.523,25.666) 94(65.43,25.654) 95(64.465,25.654) 96(63.21,25.654) 97(62.23,25.654) 98(61.112,25.654) 99(60.173,25.654) 100(59.018,25.629) 101(57.992,25.629) 102(56.769,25.629) 103(55.931,25.64) 104(56.439,24.308) 105(56.464,23.343) 106(56.439,22.405) 107(56.439,21.438) 108(56.464,20.625) 120(45.009,25.73) 123(42.012,26.06) 124(40.932,26.137) 125(39.751,26.137) 126(39.675,25.182) 127(39.751,24.365) 304(43.739,23.874) 305(44.501,23.876) 306(45.309,23.874) 307(46.152,23.844) 308(46.914,23.828) 309(47.625,23.808) 310(48.387,23.789) 311(49.055,23.789) 312(49.733,23.664) 313(50.571,23.418) 314(51.689,23.343) 315(52.756,23.343) 316(53.746,23.307) 317(54.534,23.307) 318(55.324,23.343) 319(55.093,25.654) 320(54.404,25.64) 321(53.518,25.654) 322(52.857,25.64) 323(51.994,25.618) 324(51.105,25.629) 325(50.267,25.582) 326(49.454,25.824) 327(48.514,25.9) 328(47.752,25.895) 329(47.142,25.895) 330(46.101,25.877)

## Via types
v1: diameter 0.4, hole 0.2, Top Layer to Bottom Layer, tented both sides, 14 vias
v2: diameter 0.508, hole 0.254, Top Layer to Bottom Layer, tented both sides, 7 vias

## Nets (pads, with @x,y where several pads share a name; then routed paths per layer and width w, separated by ;. In a path a pad name is that pad's centre, name@x,y a point inside that pad or via, vN(x,y) a via of type N, cw(c..) or ccw(c..) an arc to the next point about the centre after c; other vN are vias at no path point)
GND: C1.2 C2.1 C3.1 C4.1 C5.2 C7.2 C8.1 C9.2 C10.1 C11.1 C12.2 C13.2 J2.1 J2.2 J5.1 J5.2 J7.A1 J7.A12 J7.B1 J7.B12 pad.2 pad.14 pad.15 pad.16 pad.17 pad.18 pad.19 pad.20 pad.21 pad.22 pad.23 pad.24 pad.25 pad.26 pad.27 pad.28@17.457,33.96 pad.28@18.747,33.96 pad.28@21.337,22.962 pad.28@21.363,23.901 pad.28@21.591,33.096 pad.28@21.591,34.061 pad.28@27.002,20.574 pad.28@27.002,21.565 pad.28@40.514,33.604 pad.29@17.861,33.96 pad.29@19.152,33.96 pad.29@21.742,22.962 pad.29@21.768,23.901 pad.29@21.996,33.096 pad.29@21.996,34.061 pad.29@27.407,20.574 pad.29@27.407,21.565 pad.29@40.919,33.604 pad.30@18.268,33.96 pad.30@19.558,33.96 pad.30@22.149,22.962 pad.30@22.174,23.901 pad.30@22.403,33.096 pad.30@22.403,34.061 pad.30@27.813,20.574 pad.30@27.813,21.565 pad.30@41.326,33.604 pad.31@18.268,33.452 pad.31@19.558,33.452 pad.31@22.149,22.454 pad.31@22.174,23.393 pad.31@22.403,32.588 pad.31@22.403,33.553 pad.31@27.813,20.066 pad.31@27.813,21.057 pad.31@41.326,33.096 pad.32@17.861,33.452 pad.32@19.152,33.452 pad.32@21.742,22.454 pad.32@21.768,23.393 pad.32@21.996,32.588 pad.32@21.996,33.553 pad.32@27.407,20.066 pad.32@27.407,21.057 pad.32@40.919,33.096 pad.33@17.457,33.452 pad.33@18.747,33.452 pad.33@21.337,22.454 pad.33@21.363,23.393 pad.33@21.591,32.588 pad.33@21.591,33.553 pad.33@27.002,20.066 pad.33@27.002,21.057 pad.33@40.514,33.096 pad.34@13.843,23.038 pad.34@13.843,24.181 pad.34@19.99,35.916 pad.34@19.975,34.011 pad.35@13.081,23.038 pad.35@13.081,24.181 pad.35@19.213,34.011 pad.35@19.228,35.916 pad.36@12.224,23.038 pad.36@12.224,24.181 pad.36@18.356,34.011 pad.36@18.371,35.916 pad.37@11.303,23.038 pad.37@11.303,24.181 pad.37@17.45,35.916 pad.37@17.435,34.011 pad.38@11.303,22.504 pad.38@11.303,23.647 pad.38@17.45,35.382 pad.38@17.435,33.477 pad.39@12.224,22.504 pad.39@12.224,23.647 pad.39@18.356,33.477 pad.39@18.371,35.382 pad.40@13.081,22.504 pad.40@13.081,23.647 pad.40@19.213,33.477 pad.40@19.228,35.382 pad.41@13.843,22.504 pad.41@13.843,23.647 pad.41@19.99,35.382 pad.41@19.975,33.477 R2.1 R3.1 R8.2 U1.3 U1.16 U1.22 U1.25 U1.26 U1.27 U1.28 | length 22.1
  Top Layer w0.254: R8.2 4.74,25.009 5.44,25.709 J2.1 ; C12.2 C12.2@10.014,20.135 ; C2.1@22.994,22.659 C2.1@23.537,23.202 ; C2.1 C2.1@24.554,23.156 ; R2.1@27.44,22.534 R2.1 ; C3.1@28.908,24.78 C3.1@29.006,24.682 ; v1@32.636,22.485 U1.22 ; v1(32.663,22.485) 32.691,22.457 32.691,22.222 33.254,21.659 R3.1 ; U1.25@32.907,24.128 U1.25 U1.25@33.19,24.411 ; C9.2@37.884,24.749 C9.2 ; v2(55.603,11.992) 55.623,11.992 56.526,11.089 J7.A1 57.72,11.089 57.97,10.839 J7.B12 ; J7.A12 57.709,16.589 57.959,16.339 J7.B1
  Bottom Layer w0.254: v1(30.425,20.554) 32.137,20.554 32.537,20.955 32.537,21.996 32.663,22.122 v1(32.663,22.485) ; v2(55.603,11.992) 54.737,12.858 54.737,15.824 v2(55.905,16.993)
  other v1: 40.945,24.892
  other v2: 8.077,22.784 18.694,34.823
NetC1_1: C1.1 C2.2 C3.2 C4.2 C10.2 FB1.2 J3.1 J3.2 pad.28@36.94,26.198 pad.28@36.94,27.076 pad.28@38.203,27.076 pad.28@38.228,26.162 pad.29@37.345,26.198 pad.29@37.345,27.076 pad.29@38.608,27.076 pad.29@38.633,26.162 pad.30@37.751,26.198 pad.30@37.751,27.076 pad.30@39.04,26.162 pad.30@39.014,27.076 pad.31@37.751,25.69 pad.31@37.751,26.568 pad.31@39.04,25.654 pad.31@39.014,26.568 pad.32@37.345,25.69 pad.32@37.345,26.568 pad.32@38.608,26.568 pad.32@38.633,25.654 pad.33@36.94,25.69 pad.33@36.94,26.568 pad.33@38.203,26.568 pad.33@38.228,25.654 pad.34@20.777,21.641 pad.34@21.539,20.602 pad.34@23.038,26.068 pad.34@23.038,27.03 pad.34@23.038,28.042 pad.35@20.015,21.641 pad.35@20.777,20.602 pad.35@22.276,26.068 pad.35@22.276,27.03 pad.35@22.276,28.042 pad.36@16.542,24.689 pad.36@16.542,25.832 pad.36@16.542,26.924 pad.36@19.92,20.602 pad.36@21.419,26.068 pad.36@21.419,27.03 pad.36@21.419,28.042 pad.37@15.621,24.689 pad.37@15.621,25.832 pad.37@15.621,26.924 pad.37@20.498,26.068 pad.37@20.498,27.03 pad.37@20.498,28.042 pad.38@15.621,24.155 pad.38@15.621,25.298 pad.38@15.621,26.391 pad.38@20.498,25.535 pad.38@20.498,26.496 pad.38@20.498,27.508 pad.39@16.542,24.155 pad.39@16.542,25.298 pad.39@16.542,26.391 pad.39@19.92,20.069 pad.39@21.419,25.535 pad.39@21.419,26.496 pad.39@21.419,27.508 pad.40@20.015,21.107 pad.40@20.777,20.069 pad.40@22.276,25.535 pad.40@22.276,26.496 pad.40@22.276,27.508 pad.41@20.777,21.107 pad.41@21.539,20.069 pad.41@23.038,25.535 pad.41@23.038,26.496 pad.41@23.038,27.508 R1.1 U1.5 U1.6 U1.13 U1.14 | length 5.3
  Top Layer w0.254: R1.1 3.647,29.919 4.029,30.3 J3.1 ; 29.369,26.949 29.369,26.485 29.921,25.933 v1(29.947,25.933) ; U1.14@30.265,25.682 U1.14 ; U1.13@30.484,26.184 U1.13 ; C4.2@35.771,26.183 C4.2
  Bottom Layer w0.254: v1(29.947,25.933) v1@29.972,25.959 ; v1@34.874,25.959 v1(34.9,25.984)
  other v2: 16.51,27.661 13.767,31.598
NetC5_1: C5.1 U1.21 | length 1.8
  Top Layer w0.254: C5.1 31.536,21.599 32.136,22.199 U1.21
NetC6_1: C6.1 R3.2 R6.1 U1.24 | length 2.7
  Top Layer w0.254: U1.24 33.636,22.811 33.892,22.555 34.468,22.555 34.975,22.048 R6.1 R6.1@34.975,21.274 ; C6.1@34.975,19.519 C6.1
NetC6_2: C6.2 C7.1 C8.2 C9.1 J4.1 J4.2 J7.A4 J7.A9 J7.B4 J7.B9 L1.2 pad.28@23.192,38.633 pad.28@23.217,37.617 pad.28@24.502,37.617 pad.28@24.502,38.633 pad.28@25.782,38.633 pad.28@25.808,37.617 pad.28@30.608,37.998 pad.28@31.929,37.998 pad.28@33.25,37.998 pad.28@34.52,37.998 pad.28@35.765,37.973 pad.28@36.452,23.238 pad.28@36.894,22.377 pad.28@39.829,37.363 pad.28@41.022,37.363 pad.28@41.886,36.373 pad.29@23.597,38.633 pad.29@23.622,37.617 pad.29@24.906,37.617 pad.29@24.906,38.633 pad.29@26.187,38.633 pad.29@26.213,37.617 pad.29@31.013,37.998 pad.29@32.334,37.998 pad.29@33.655,37.998 pad.29@34.925,37.998 pad.29@36.17,37.973 pad.29@36.857,23.238 pad.29@37.299,22.377 pad.29@40.234,37.363 pad.29@41.427,37.363 pad.29@42.291,36.373 pad.30@24.003,38.633 pad.30@24.028,37.617 pad.30@25.313,37.617 pad.30@25.313,38.633 pad.30@26.594,38.633 pad.30@26.619,37.617 pad.30@31.42,37.998 pad.30@32.741,37.998 pad.30@34.061,37.998 pad.30@35.331,37.998 pad.30@36.576,37.973 pad.30@37.263,23.238 pad.30@37.705,22.377 pad.30@40.64,37.363 pad.30@41.834,37.363 pad.30@42.697,36.373 pad.31@24.003,38.125 pad.31@24.028,37.109 pad.31@25.313,37.109 pad.31@25.313,38.125 pad.31@26.594,38.125 pad.31@26.619,37.109 pad.31@31.42,37.49 pad.31@32.741,37.49 pad.31@34.061,37.49 pad.31@35.331,37.49 pad.31@36.576,37.465 pad.31@37.263,22.73 pad.31@40.64,36.855 pad.31@41.834,36.855 pad.31@42.697,35.865 pad.32@23.597,38.125 pad.32@23.622,37.109 pad.32@24.906,37.109 pad.32@24.906,38.125 pad.32@26.187,38.125 pad.32@26.213,37.109 pad.32@31.013,37.49 pad.32@32.334,37.49 pad.32@33.655,37.49 pad.32@34.925,37.49 pad.32@36.17,37.465 pad.32@36.857,22.73 pad.32@37.299,21.869 pad.32@40.234,36.855 pad.32@41.427,36.855 pad.32@42.291,35.865 pad.33@23.192,38.125 pad.33@23.217,37.109 pad.33@24.502,37.109 pad.33@24.502,38.125 pad.33@25.782,38.125 pad.33@25.808,37.109 pad.33@30.608,37.49 pad.33@31.929,37.49 pad.33@33.25,37.49 pad.33@34.52,37.49 pad.33@35.765,37.465 pad.33@36.452,22.73 pad.33@39.829,36.855 pad.33@41.022,36.855 pad.33@41.886,35.865 R4.1 R6.2 R7.1 U1.1 | length 11.9
  Top Layer w0.254: U1.1 34.507,23.682 U1.1@34.511,23.678 ; C6.2 C6.2@36.475,19.519 ; R4.1 52.105,11.203 52.4,10.908 R7.1 ; J7.A4 57.709,12.589 57.959,12.339 ; J7.A9 v1(57.882,15.089) 58.132,14.839 J7.B4 ; v1(57.882,13.665) 57.882,12.415 57.959,12.339 ; J7.B9 57.959,12.339
  Bottom Layer w0.254: v1(57.882,13.665) 58.361,13.665 58.852,14.156 58.852,14.554 58.547,14.859 58.18,14.859 57.951,15.089 v1(57.882,15.089)
  other v1: 57.201,29.108
NetC11_2: C11.2 C12.1 C13.1 FB1.1 J1.1 J1.2 pad.34@14.224,15.926 pad.34@14.224,17.043 pad.34@17.551,15.418 pad.35@13.462,15.926 pad.35@13.462,17.043 pad.35@16.789,15.418 pad.36@12.605,15.926 pad.36@12.605,17.043 pad.36@15.933,15.418 pad.37@11.684,15.926 pad.37@11.684,17.043 pad.37@15.011,15.418 pad.38@11.684,15.392 pad.38@11.684,16.51 pad.38@15.011,14.884 pad.39@12.605,15.392 pad.39@12.605,16.51 pad.39@15.933,14.884 pad.40@13.462,15.392 pad.40@13.462,16.51 pad.40@16.789,14.884 pad.41@14.224,15.392 pad.41@14.224,16.51 pad.41@17.551,14.884
  other v2: 10.68,17.17
NetJ7_A5: J7.A5 R7.2 | length 4.2
  Top Layer w0.254: R7.2 54.754,12.158 55.684,13.089 J7.A5
NetJ7_B5: J7.B5 R4.2 | length 5.5
  Top Layer w0.254: R4.2 55.156,13.868 v1(55.626,14.339) ; v1(57.887,14.339) J7.B5
  Bottom Layer w0.254: v1(55.626,14.339) v1(57.887,14.339)
NetL1_1: L1.1 pad.28@30.384,33.02 pad.28@31.675,33.02 pad.28@32.971,33.02 pad.28@34.241,33.02 pad.28@35.485,33.02 pad.29@30.789,33.02 pad.29@32.08,33.02 pad.29@33.376,33.02 pad.29@34.646,33.02 pad.29@35.89,33.02 pad.30@31.195,33.02 pad.30@32.487,33.02 pad.30@33.782,33.02 pad.30@35.052,33.02 pad.30@36.297,33.02 pad.31@31.195,32.512 pad.31@32.487,32.512 pad.31@33.782,32.512 pad.31@35.052,32.512 pad.31@36.297,32.512 pad.32@30.789,32.512 pad.32@32.08,32.512 pad.32@33.376,32.512 pad.32@34.646,32.512 pad.32@35.89,32.512 pad.33@30.384,32.512 pad.33@31.675,32.512 pad.33@32.971,32.512 pad.33@34.241,32.512 pad.33@35.485,32.512 U1.8 U1.9 U1.10 U1.11 U1.12 | length 0.7
  Top Layer w0.254: L1.1@31.63,28.091 L1.1@32.136,28.597
NetR1_2: R1.2 R8.1 U1.17 | length 51.3
  Top Layer w0.254: R8.1 3.572,26.511 3.572,27.356 ; R1.2 3.572,27.356 ; v1(26.352,21.901) 23.814,21.901 13.673,11.76 5.41,11.76 4.801,12.37 4.801,21.031 4.115,21.717 4.115,23.956 3.966,24.105 2.946,24.105 2.464,24.587 2.464,27.102 2.743,27.381 3.547,27.381 3.572,27.356 ; v1(28.908,23.707) 29.534,23.707 30.009,24.182 U1.17
  Bottom Layer w0.254: v1(26.352,21.901) 26.352,23.228 26.831,23.707 v1(28.908,23.707)
NetR2_2: R2.2 U1.18 | length 2.3
  Top Layer w0.254: R2.2 28.962,22.512 29.599,22.512 29.769,22.682 29.769,23.152 30.263,23.647 30.263,23.68 30.265,23.682 U1.18
NetU1_2: U1.2 U1.20 | length 7.1
  Top Layer w0.254: v1(31.609,22.485) 31.634,22.51 31.634,23.03 U1.20 ; U1.2 34.288,24.18 34.726,24.18 35.462,23.444 v1(35.875,23.444)
  Bottom Layer w0.254: v1(31.609,22.485) 32.569,23.444 v1(35.875,23.444)
pads on no net: J7. J7.1 J7.2 J7.3 J7.4 J7.A2 J7.A3 J7.A6 J7.A7 J7.A8 J7.A10 J7.A11 J7.B2 J7.B3 J7.B6 J7.B7 J7.B8 J7.B10 J7.B11 U1. U1.4 U1.7 U1.15 U1.19 U1.23

## Polygon pours and split planes (outlines as drawn)
GND on Bottom Layer "GND_L02_P005" (solid, pour order 5): 66.218,24.994 66.218,20.872 58.708,20.872 57.026,20.872 57.026,23.876 50.571,23.876 49.4,24.308 41.682,24.308 40.183,24.308 40.183,25.425 41.733,25.425 49.022,25.425 50.267,24.994 57.026,24.994
no net on Bottom Layer "NONET_L02_P007" (solid, pour order 7): -0.178,51.333 -0.102,51.257 67.386,51.257 67.386,0.051 67.437,0 -0.122,0
no net on Top Layer "NONET_L01_P006" (solid, pour order 6): -0.122,51.308 67.285,51.308 67.437,51.156 67.437,0 -0.076,0 -0.127,-0.051

## Other copper
Top Layer:
  region net NetC6_2: 23.165,34.823 26.187,34.823 26.873,35.509 42.037,35.509 42.037,23.546 36.449,23.493 36.207,23.012 35.417,23.012 34.561,23.825 33.934,23.825 33.934,23.546 34.492,23.546 36.043,21.946 36.043,18.948 36.881,18.948 36.881,21.158 38.43,22.666 43.84,22.666 43.84,28.665 51.038,28.665 51.038,16.332 51.714,14.554 51.714,13.411 52.502,13.411 52.502,14.961 56.934,14.961 56.934,15.215 56.523,15.215 55.042,16.053 53.232,17.863 53.232,18.102 53.232,28.702 66.269,28.702 66.269,32.868 43.84,32.868 43.84,44.501 21.031,44.501 21.031,36.957
  region net NetC1_1: 33.934,26.314 34.722,26.314 34.722,27.305 39.929,27.305 39.929,25.552 33.934,25.552
  region net NetC1_1: 27.441,25.425 27.611,25.595 30.785,25.595 30.785,26.289 29.928,26.289 29.725,26.492 29.725,27.254 26.67,27.254 26.67,28.423 20.428,28.423 20.428,28.397 17.33,28.397 16.618,29.108 16.618,32.41 16.644,32.436 4.833,32.436 4.833,28.27 14.407,28.27 17.252,25.425
  region net GND: 53.603,18.188 55.305,16.486 56.931,16.486 56.931,16.766 56.499,16.766 56.499,18.628 58.665,20.793 58.628,20.83 66.176,20.83 66.227,20.881 66.176,20.931 66.176,24.97 53.603,24.97
  region net GND: 25.908,34.366 22.555,34.366 20.752,36.17 17.094,36.17 17.094,29.134 17.12,29.108 17.17,29.159 19.583,29.159 19.583,29.413 22.606,32.436 25.908,32.436
  region net GND: 16.769,21.844 16.769,22.301 26.518,22.301 26.822,21.996 26.822,19.761 31.979,19.761 31.979,20.766 30.48,20.766 30.48,21.514 28.042,21.514 28.042,21.996 28.042,23.468 28.756,24.182 29.275,24.182 29.464,24.371 29.464,24.358 29.668,24.562 31.166,24.562 31.166,23.707 31.871,23.707 32.461,23.707 32.524,23.165 32.754,23.165 32.817,23.707 33.611,23.707 33.611,24.252 33.611,24.562 35.149,24.562 35.149,24.243 41.656,24.252 41.656,35.038 40.144,35.038 40.144,25.232 35.152,25.232 35.163,24.816 33.611,24.816 33.611,26.162 31.166,26.162 31.166,24.816 29.697,24.816 29.464,25.195 28.092,25.195 27.77,25.092 26.925,25.095 25.959,24.128 13.792,24.128 13.792,27.716 4.801,27.716 4.801,21.844 9.728,21.844 9.728,19.812 10.363,19.812 10.363,21.844
  region net NetC6_1: 34.595,21.895 34.595,20.904 34.457,20.766 32.907,20.766 32.907,20.055 32.893,20.041 34.544,20.041 34.646,19.939 34.646,18.999 35.382,18.999 35.379,19.002 35.379,21.895
  region net NetC11_2: 13.386,19.584 13.386,12.497 5.664,12.497 5.664,15.341 9.703,15.341 9.703,19.584
  region net NetL1_1: 39.224,34.925 39.224,27.517 33.281,27.517 33.281,26.518 31.02,26.518 31.02,27.517 27.413,27.517 27.413,27.915 27.413,34.925
Bottom Layer:
  region net NetC1_1: 35.23,26.289 35.23,25.603 29.413,25.603 29.413,26.289
  region net NetC1_1: 16.561,32.41 16.561,30.607 14.148,30.607 11.836,28.296 4.851,28.296 4.851,32.41
  region net NetC1_1: 18.88,17.857 18.879,16.993 18.879,15.24 23.121,15.24 23.197,15.316 23.197,19.964 21.031,22.13 21.031,24.509 21.996,24.509 21.996,25.425 26.55,25.425 26.55,25.883 26.55,26.06 26.55,28.423 22.613,28.423 22.41,28.423 22.206,28.423 14.942,28.423 14.942,24.028 15.018,23.952 17.609,23.952 17.609,20.041 18.904,18.745 18.879,18.771
  region net GND: 19.558,32.512 20.752,33.706 20.752,36.17 17.094,36.17 17.094,30.309 14.346,30.309 11.931,27.709 4.795,27.701 4.795,21.793 9.739,21.793 9.728,20.422 9.754,20.396 9.754,19.837 16.764,19.837 16.764,23.343 14.372,23.343 14.372,27.711 14.346,27.711 14.346,28.976 19.558,29.134
  region net NetC6_2: 66.269,32.868 56.744,32.868 56.744,28.727 66.269,28.727
  region net NetC11_2: 18.009,18.923 17.281,19.583 14.465,19.583 9.754,19.583 9.728,19.583 9.703,19.583 9.703,15.367 5.685,15.367 5.685,12.469 18.009,12.469 18.009,16.205